# Altium PCB Distro_layout_B.PcbDoc
Units mm, origin at the board's own origin, x right, y up, seen from the top; angles counter-clockwise.
Board outline 45.08 x 37.66 mm, 2 copper layers (Top Layer, Bottom Layer); 20 components, 12 nets, 64 pads, 3 vias.
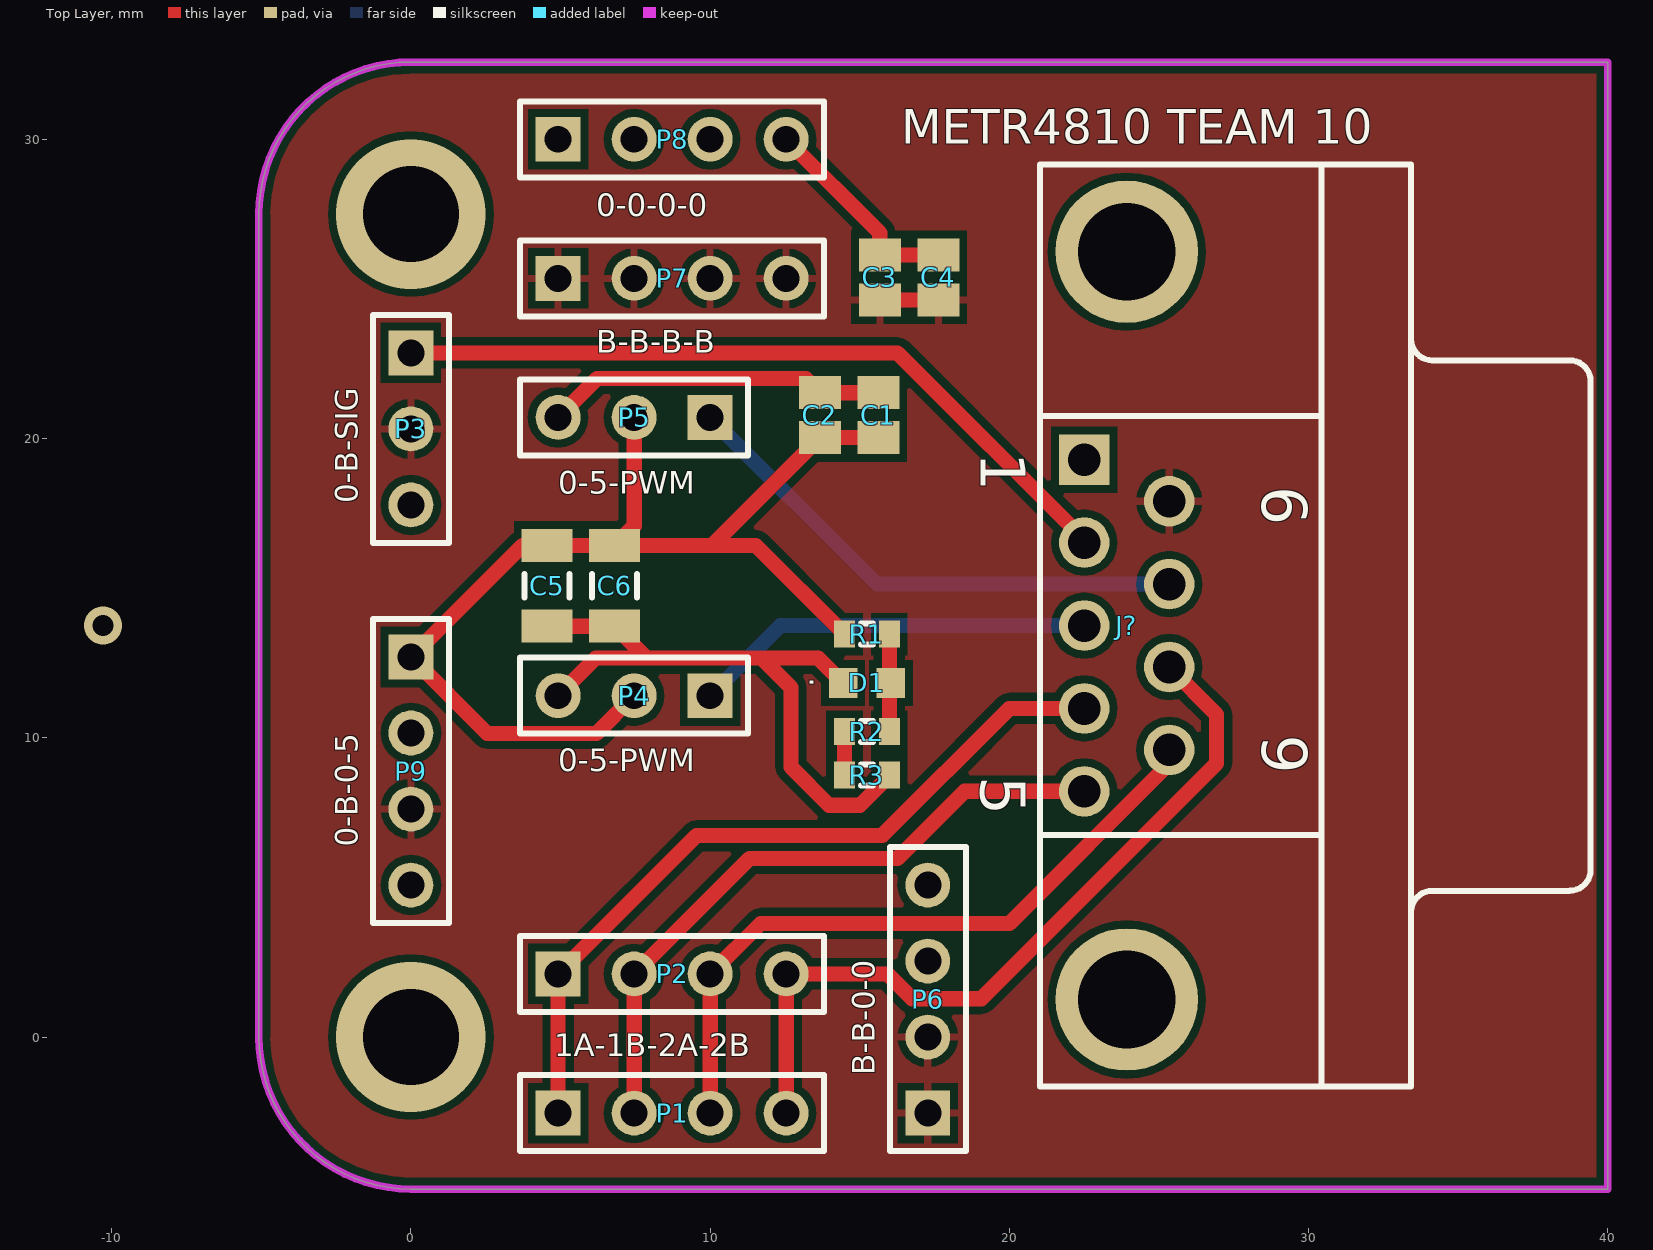
[diagram p0: Top Layer view]
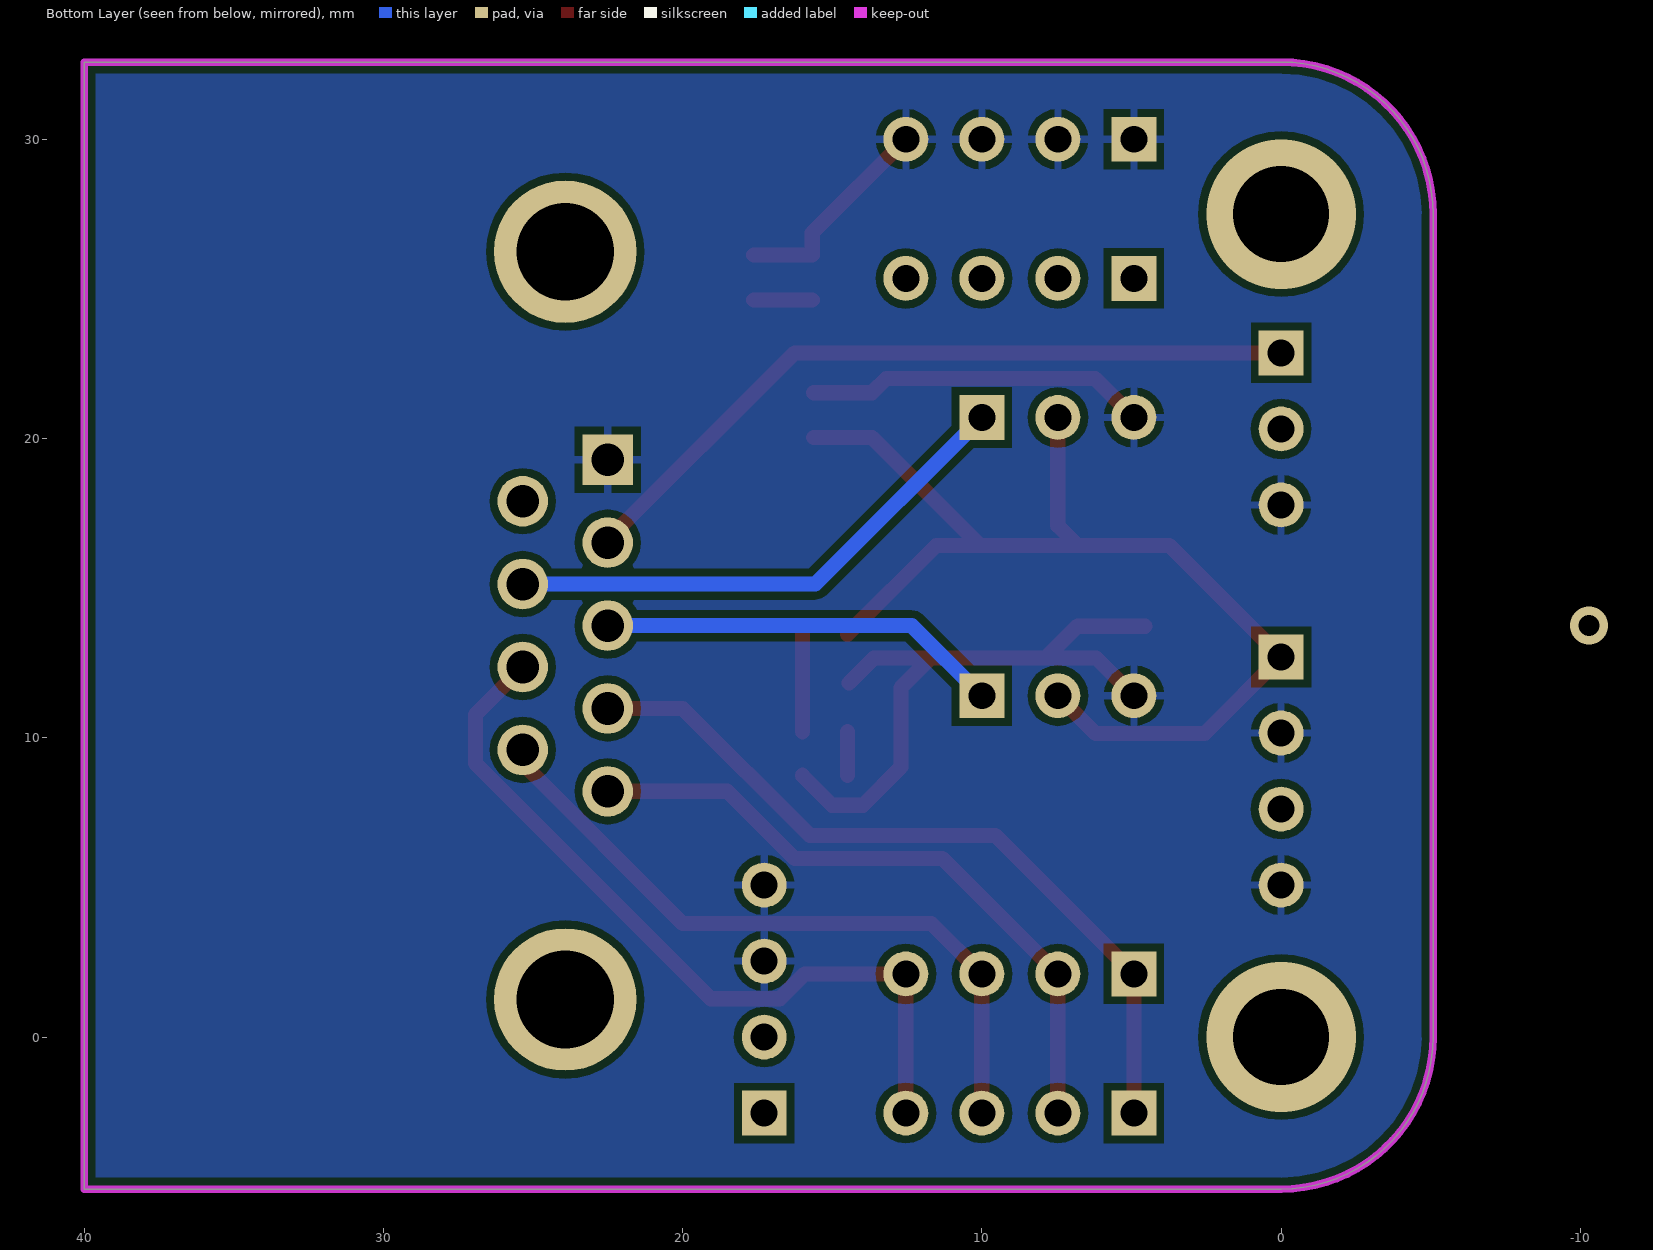
[diagram p1: Bottom Layer view, seen from below]

## Layer stack, top to bottom
Top Solder: solder mask 0.0102, Solder Resist, Dk 3.5
Top Layer: signal copper 0.0356
Dielectric 1: dielectric 0.32, FR-4, Dk 4.8
Bottom Layer: signal copper 0.0356
Bottom Solder: solder mask 0.0102, Solder Resist, Dk 3.5

## Board outline
-5.08,0 ccw(c0,0) 0,-5.08 40,-5.08 40,32.58 0,32.58 ccw(c0,27.5) -5.08,27.5

## Design rules (kind name [scope] priority, off if disabled: settings)
Clearance [All] p1: gap=0.254
PolygonConnect [All] p1: connectstyle=Relief reliefconductorwidth=0.254 reliefentries=4 polygonreliefangle="90 Angle" airgapwidth=0.254
RoomDefinition Distro_schematic [InComponentClass('Distro_schematic')] p1: confinementstyle=ConfineIn formatcopy=TRUE lockcomponents=FALSE outline -5.08,-5.08 40,-5.08 40,32.58 -5.08,32.58
RoutingVias [All] p1: holewidth=0.711 width=1.27 viastyle="Through Hole" minholewidth=0.711 minwidth=1.27 maxholewidth=0.711 maxwidth=1.27
SolderMaskExpansion [All] p1: expansion=0.102
Width [All] p1: maxlimit=1.016 minlimit=0.254 preferedwidth=0.508
30 further rules are at their usual default settings.

## Components (designator, comment, footprint, x,y, rotation, side; value= is the part's Value field where it differs from the comment)
C1 "Cap Pol3" C0805 15.621,20.783 r90 top
C2 "Cap Pol3" C0805 13.667,20.783 r90 top
C3 "Cap Pol3" C0805 15.669,25.383 r90 top
C4 "Cap Pol3" C0805 17.624,25.383 r90 top
C5 "Cap Semi" C1206 4.55,15.08 r90 top
C6 "Cap Semi" C1206 6.804,15.08 r90 top
D1 "LED1" L0603 15.24,11.833 r180 top
J? "D Connector 9" DSUB1.385-2H9 33.421,13.75 r270 top
P1 "Header 4" HDR1X4 4.92,-2.54 r0 top
P2 "Header 4" HDR1X4 4.92,2.109 r0 top
P3 "Header 3" HDR1X3 0,22.86 r270 top
P4 "Header 3" HDR1X3 10,11.406 r180 top
P5 "Header 3" HDR1X3 10,20.703 r180 top
P6 "Header 4" HDR1X4 17.272,-2.54 r90 top
P7 "Header 4" HDR1X4 4.92,25.351 r0 top
P8 "Header 4" HDR1X4 4.92,30 r0 top
P9 "Header 4" HDR1X4 0,12.7 r270 top
R1 "Res3" J1-0603 15.24,13.462 r0 top
R2 "Res3" J1-0603 15.24,10.203 r180 top
R3 "Res3" J1-0603 15.24,8.749 r0 top

## Footprints (in the part's own frame and the unit in brackets; to place one, negate y for a bottom-side part, rotate by r counter-clockwise, add the part's x,y. Pads: shape width x height; smd on the part's side, far side on the other; paste and mask are expansions set on the pad)
C0805 [mm] "Chip Capacitor, Body 2.0x1.3mm, IPC High Density"
  rect 1.1x1.4 smd: 1(-0.75,0) 2(0.75,0)
  body extent -1.1,-0.72 1.1,0.72, height 1.4
C1206 [mm] "Chip Capacitor, Body 3.2x1.6mm, IPC High Density"
  rect 1.1x1.7 smd: 1(-1.35,0) 2(1.35,0)
  silkscreen extent -0.4,-0.75 0.4,0.75, body extent -1.7,-0.9 1.7,0.9, height 1.3
DSUB1.385-2H9 [mm] "Connector; D Subminiature; 9 Position; Right Angle; Pitch 1.385 mm"
  rect 1.69x1.69 hole 1.09: 1(-5.54,-10.92)
  round 1.69 hole 1.09: 2(-2.77,-10.92) 3(0,-10.92) 4(2.77,-10.92) 5(5.54,-10.92) 6(-4.155,-8.08) 7(-1.385,-8.08) 8(1.385,-8.08) 9(4.155,-8.08)
  round 4.76 hole 3.26: 10(-12.495,-9.5) 11(12.495,-9.5)
  silkscreen extent -15.4,-12.4 15.4,6
HDR1X3 [mm] "Connector; Header; 3 Position"
  rect 1.5x1.5 hole 0.9: 1(0,0)
  round 1.5 hole 0.9: 2(2.54,0) 3(5.08,0)
  silkscreen extent -1.27,-1.27 6.35,1.27
HDR1X4 [mm] "Connector; Header; 4 Position"
  rect 1.5x1.5 hole 0.9: 1(0,0)
  round 1.5 hole 0.9: 2(2.54,0) 3(5.08,0) 4(7.62,0)
  silkscreen extent -1.27,-1.27 8.89,1.27
J1-0603 [mm] "Chip Resistor, Body 1.6x0.8mm, IPC High Density"
  rect 0.7x0.9 smd: 1(-0.75,0) 2(0.75,0)
  silkscreen extent -0.2,-0.35 0.2,0.35, body extent -0.85,-0.48 0.85,0.48, height 0.9
L0603 [mm]
  rect 0.95x1 smd: 1(-0.8,0) 2(0.8,0)

## Part data
C1 C2 C3 C4: "Polarized Capacitor (Surface Mount)"
C5 C6: "Capacitor (Semiconductor SIM Model)"
D1: "Typical RED GaAs LED"
J?: "Receptacle Assembly, 9 Position, Right Angle"
P1 P2 P6 P7 P8 P9: "Header, 4-Pin"
P3 P4 P5: "Header, 3-Pin"
R1 R2 R3: "Resistor"

## Via types
v1: diameter 5, hole 3.2, Top Layer to Bottom Layer, 2 vias
v2: diameter 1.27, hole 0.711, Top Layer to Bottom Layer, 1 vias

## Nets (pads, with @x,y where several pads share a name; then routed paths per layer and width w, separated by ;. In a path a pad name is that pad's centre, name@x,y a point inside that pad or via, vN(x,y) a via of type N, cw(c..) or ccw(c..) an arc to the next point about the centre after c; other vN are vias at no path point)
BAT: C3.1 C4.1 J?.6 P3.2 P6.1 P6.2 P7.1 P7.2 P7.3 P7.4 P9.3 | length 2
  Top Layer w0.508: C3.1 C4.1
CAM_SIG: J?.2 P3.1 | length 25.2
  Top Layer w0.508: P3.1 16.262,22.86 22.501,16.621 J?.2
GND: C1.2 C2.2 C3.2 C4.2 C5.1 C6.1 D1.2 J?.1 P3.3 P4.3 P5.3 P6.3 P6.4 P8.1 P8.2 P8.3 P8.4 P9.2 P9.4 R3.2 | length 41
  Top Layer w0.508: C5.1 C6.1 7.871,12.664 ; P4.3 6.178,12.664 7.871,12.664 ; P5.3 6.223,22.006 13.194,22.006 C2.2 C1.2 ; P8.4 15.669,26.871 C3.2 C4.2 ; D1.2 13.609,12.664 11.72,12.664 ; R3.2 15.99,8.731 15.006,7.747 13.974,7.747 12.7,9.021 12.7,11.684 11.72,12.664 ; 7.871,12.664 11.72,12.664
MOTOR_1A: J?.4 P1.1 P2.1 | length 25.9
  Top Layer w0.508: P1.1 P2.1 9.542,6.731 15.748,6.731 19.997,10.98 J?.4
MOTOR_1B: J?.5 P1.2 P2.2 | length 22.2
  Top Layer w0.508: P1.2 P2.2 11.32,5.969 16.256,5.969 18.497,8.21 J?.5
MOTOR_2A: J?.9 P1.3 P2.3 | length 23.4
  Top Layer w0.508: P1.3 P2.3 11.689,3.798 20.003,3.798 25.341,9.137 J?.9
MOTOR_2B: J?.8 P1.4 P2.4 | length 26.5
  Top Layer w0.508: P1.4 P2.4 15.924,2.109 16.751,1.282 19.062,1.282 26.924,9.144 26.924,10.782 J?.8
NetD1_1: D1.1 R1.2 R2.1 | length 3.3
  Top Layer w0.508: R2.1 R1.2
NetR2_2: R2.2 R3.1 | length 1.5
  Top Layer w0.508: R3.1 R2.2
"PWM SV 1": J?.3 P4.1 | length 13.5
  Bottom Layer w0.508: P4.1 12.344,13.75 J?.3
"PWM SV 2": J?.7 P5.1 | length 17.6
  Bottom Layer w0.508: P5.1 15.568,15.135 J?.7
VCC: C1.1 C2.1 C5.2 C6.2 P4.2 P5.2 P9.1 R1.1 | length 38.1
  Top Layer w0.508: P4.2 6.202,10.148 2.552,10.148 P9.1 3.73,16.43 C5.2 C6.2 ; P5.2@7.618,20.703 P5.2 7.46,17.086 C6.2 ; R1.1 11.522,16.43 10.064,16.43 ; C1.1 C2.1 10.064,16.43 ; C6.2 10.064,16.43
pads on no net: J?.10 J?.11
copper on no net:
  other v1: 0,0 0,27.5
  other v2: -10.287,13.75

## Polygon pours and split planes (outlines as drawn)
BAT on Top Layer "BAT_L01_P000" (solid, remove dead copper, pour order 0): -5.08,-5.08 -5.08,32.58 40,32.58 40,-5.08
GND on Bottom Layer "GND_L02_P001" (solid, remove dead copper, pour order 1): -5.08,-5.08 -5.08,32.58 40,32.58 40,-5.08

## Keep-outs
Keep-Out Layer:
  the board outline again, w0.254

## Silkscreen, mask and mechanical layers (free items; w line width, h text height)
Top Overlay:
  text "METR4810 TEAM 10" at 16.383,29.845 h1.14
  text "0-0-0-0" at 6.191,27.432 h0.76
  text "B-B-B-B" at 6.191,22.86 h0.76
  text "0-5-PWM" at 4.921,18.161 h0.76
  text "0-B-SIG" at -1.778,17.844 h0.76 r90
  text "." at 13.462,11.684 h0.76 r90
  text "0-5-PWM" at 4.921,8.89 h0.76
  text "0-B-0-5" at -1.778,6.351 h0.76 r90
  text "1A-1B-2A-2B" at 4.794,-0.635 h0.76
  text "B-B-0-0" at 15.494,-1.269 h0.76 r90

## Text inside footprints (layer, text, board x,y; h text height)
J?: Top Overlay "1" at 19.046,19.54 h1.5 r270; Top Overlay "5" at 19.046,8.71 h1.5 r270; Top Overlay "9" at 28.446,10.095 h1.5 r270; Top Overlay "6" at 28.446,18.405 h1.5 r270